# Altium PCB Rackmount_DSP.PcbDoc (part 23 of 24)
Units mil, origin at the board's own origin, x right, y up, seen from the top; angles counter-clockwise.
Board outline 10629.92 x 8267.72 mil, 4 copper layers (Top Layer, Mid Layer 1, Mid Layer 2, Bottom Layer), stack 36.2 mil thick; 4500 components, 1565 nets, 9765 pads, 3289 vias.
Unrouted connection lines stored in the file: 1.
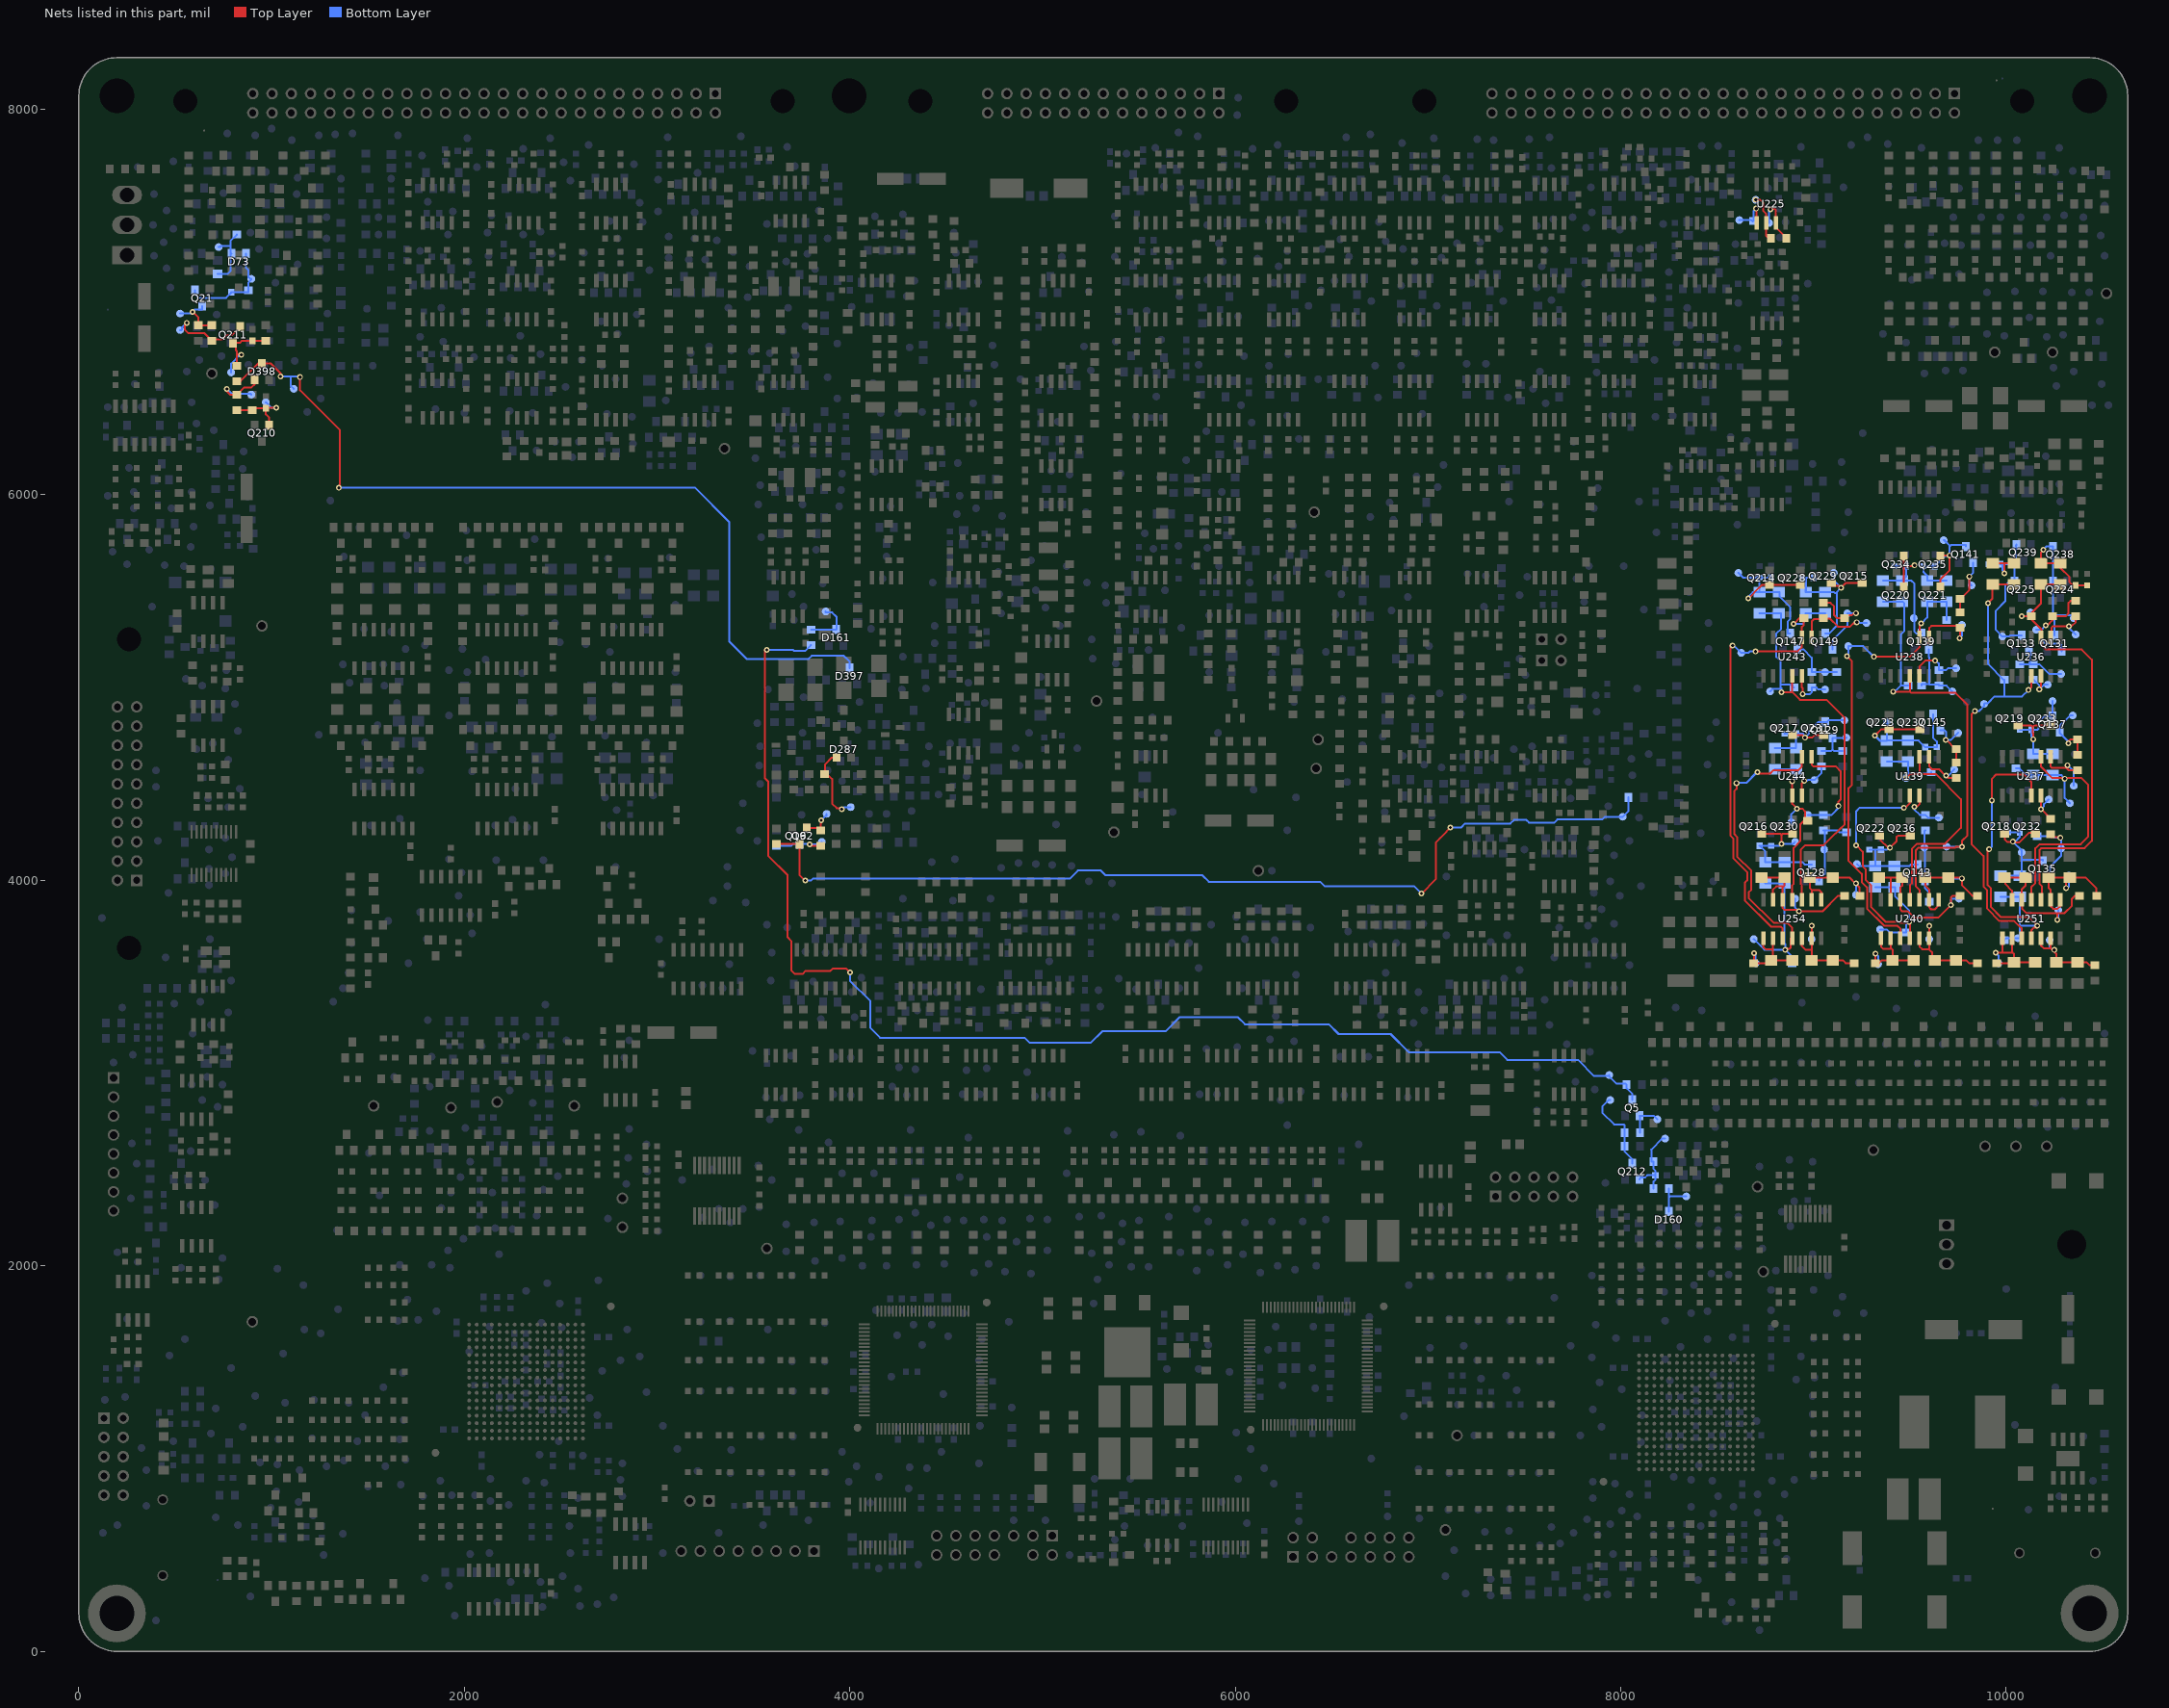
[diagram p25: the nets of this part, all layers, seen from the top]

## Via types
v1: diameter 30, hole 16, Top Layer to Bottom Layer, 3143 vias
v2: diameter 22, hole 12, Top Layer to Bottom Layer, 146 vias

## Nets (pads, with @x,y where several pads share a name; then routed paths per layer and width w, separated by ;. In a path a pad name is that pad's centre, name@x,y a point inside that pad or via, vN(x,y) a via of type N, cw(c..) or ccw(c..) an arc to the next point about the centre after c; other vN are vias at no path point) (continued)
XSIG330007: D287.1 R1093.1 TP1495.1 | length 419.8
  Top Layer w10: R1093.1@3870,4550 R1093.1@3872.5,4550 ; D287.1@3932.5,4638.5 3932.5,4635.9 3906.16,4635.9 3872.5,4602.24 R1093.1@3872.5,4550 ; v1(3957.88,4368.24) 3951.42,4368.24 3948.21,4371.45 3948.21,4374.3 3932.09,4374.3 3907.96,4398.43 3907.96,4525.05 3883.01,4550 R1093.1@3872.5,4550
  Bottom Layer w10: v1(3957.88,4368.24) 3958.12,4368.24 3969.88,4380 TP1495.1@4005,4380
XSIG330012: R1136.2 R1882.2 R1924.2 TP1779.1 U251.5 U251.6 | length 865.9
  Top Layer w10: R1924.2@9990,4015 R1924.2@9994,4015 ; U251.6@10030,3900 10030,3945.92 9994,3981.92 R1924.2@9994,4015 ; v1(10264.77,3795.5) 10264.77,3825.5 10261.54,3828.73 10261.54,3830.25 ; R1136.2@10380,3920 10356.47,3920 10340.66,3904.19 10340.66,3868.65 10302.26,3830.25 10261.54,3830.25 ; R1924.2@9994,4015 R1882.2@10100,4015 10100,3972.5 10080,3952.5 U251.5@10080,3900 10082.17,3900 10082.17,3852.03 10103.95,3830.25 10261.54,3830.25
  Bottom Layer w10: v1(10264.77,3795.5) 10270,3800.73 TP1779.1@10270,3845
XSIG330022: R1420.1 R2689.1 R2690.1 TP1778.1 U237.3 U251.4 | length 1594.2
  Top Layer w10: U251.4@10130,3900 10130,3964.53 10151.17,3985.71 10151.17,4165.65 10173.09,4187.57 10386.28,4187.57 10423.96,4225.25 10423.96,4496.42 10390,4530.38 v1@10301.37,4530.38 ; U237.3@10180,4640 10180,4590 10239.62,4530.38 v1@10301.37,4530.38 ; v1(10303.51,4526.91) 10301.37,4529.05 v1@10301.37,4530.38
  Bottom Layer w10: R1420.1@10050,4580 10068.57,4580 10103.57,4545 R2689.1@10140,4545 R2690.1@10240,4545 10286.5,4545 10303.51,4527.99 v1(10303.51,4526.91) 10303.51,4426.49 TP1778.1@10330,4400
XSIG330038: Q131.1 R2114.1 R2210.2 TP1498.1 | length 513.1
  Top Layer w10: v1(10204.25,5322.96) 10214.11,5322.96 10239.46,5348.3 10239.46,5370 R2210.2@10240,5370 10308.68,5370 10322.31,5383.63 10322.31,5438.83 10333.48,5450 R2114.1@10360,5450
  Bottom Layer w10: TP1498.1@10155,5300 10181.57,5300 10181.57,5297.86 ; v1(10204.25,5322.96) 10204.25,5320.55 10181.57,5297.86 ; Q131.1@10287.5,5188.5 10287.5,5218.35 10278.85,5227 10205.07,5227 10181.57,5250.5 10181.57,5297.86
XSIG330047: R2201.2 R2313.2 R2314.2 TP1502.1 U251.1 U251.2 | length 689.8
  Top Layer w10: U251.1@10280,3900 10280,3865.88 10266.15,3852.03 10243.22,3852.03 10230,3865.25 U251.2@10230,3900 10230,3950 10220,3960 R2314.2@10220,4015 R2313.2@10310.68,4015 ; v1(10310.68,3960.05) R2313.2@10310.68,4015 ; R2201.2@10470,3920 10467.9,3920 10467.9,3957.49 10410.39,4015 R2313.2@10330,4015 R2313.2@10310.68,4015
  Bottom Layer w10: v1(10310.68,3960.05) 10316.55,3960.05 10325,3968.5 TP1502.1@10325,4025
XSIG330060: R2276.1 R2697.1 R2698.1 TP1790.1 U236.3 U251.3 | length 2355.5
  Top Layer w10: v1(10079.41,5369.97) R2276.1@10130,5370 ; U251.3@10180,3900 10184.7,3900 10184.7,3970.09 10173.5,3981.29 10173.5,4158.71 10182.36,4167.57 10406.97,4167.57 10444.43,4205.03 10444.43,5144.36 10391.52,5197.26 10206.72,5197.26 10180,5223.98 U236.3@10180,5260 10182.58,5260 10182.58,5302.21 10130,5354.79 R2276.1@10130,5370 10130,5386.29 10180,5436.29 R2697.1@10180,5535 R2698.1@10280,5535
  Bottom Layer w10: v1(10079.41,5369.97) 10104.97,5369.97 TP1790.1@10125,5390
XSIG330062: R2114.2 TP1504.1 U236.2 | length 280
  Top Layer w10: U236.2@10230,5260 10233.72,5260 10233.72,5310 10241.77,5318.05 v1(10324.88,5318.05) 10338.01,5318.05 10360,5340.04 R2114.2@10360,5370
  Bottom Layer w10: v1(10324.88,5318.05) 10324.88,5310.12 TP1504.1@10360,5275
XSIG330065: Q133.1 R2115.1 R2211.2 TP113.1 | length 306.1
  Bottom Layer w10: R2211.2@10070,5120 R2115.1@10121.95,5120 ; Q133.1@10117.5,5188.5 10121.95,5184.05 R2115.1@10121.95,5120 ; TP113.1@10285,5070 10223.47,5070 10173.47,5120 R2115.1@10140,5120 R2115.1@10121.95,5120
XSIG330079: R2277.1 R2701.1 R2702.1 TP111.1 U236.11 U251.10 | length 2493.9
  Top Layer w10: v1(9837.08,4877.63) 9835.13,4877.63 9820.35,4862.85 9820.35,4401.73 9819.93,4401.31 9819.93,4188.09 9882.02,4126 9882.02,3967.47 9900.5,3948.99 9900.5,3853.22 9964.59,3789.13 10040.87,3789.13 10080,3750 U251.10@10080,3700 ; v1(9905.55,5437.82) 9905.55,5440.16 9928.23,5462.84 9928.23,5522.22 9920.72,5529.72 9926,5535 R2702.1@9930,5535 R2701.1@10040,5535 ; v1(10115.71,4987.11) 10130,5001.4 U236.11@10130,5060
  Bottom Layer w10: v1(9837.08,4877.63) 9858.68,4877.63 9865.75,4884.7 ; 9865.75,4884.75 9885,4904 TP111.1@9885,4915 9888.35,4918.35 9903.35,4918.35 9939.02,4954.02 9990,4954.02 ; v1(9905.55,5437.82) 9905.55,5121.95 9987.5,5040 R2277.1@9990,5040 9990,4954.02 ; v1(10115.71,4987.11) 10082.43,4953.83 9990,4953.83 9990,4954.02
XSIG330080: R2115.2 TP1507.1 U236.12 | length 189.8
  Top Layer w10: v1(10171.28,4990.51) 10180,4999.23 U236.12@10180,5060
  Bottom Layer w10: R2115.2@10140,5040 10142.5,5040 10173.11,5009.39 v1@10173.11,4992.34 ; v1(10171.28,4990.51) v1@10173.11,4992.34 ; TP1507.1@10215,5015 10195.77,5015 v1@10173.11,4992.34
XSIG330084: Q135.1 R2116.1 R2212.2 TP1777.1 | length 419.8
  Top Layer w10: R2116.1@10230,4240 10230,4225 10267.5,4225 10271.9,4220.6 v1(10280.71,4220.6)
  Bottom Layer w10: R2212.2@10160,4230 10241.31,4230 10250.71,4220.6 v1(10280.71,4220.6) 10285,4216.31 TP1777.1@10285,4165 10285,4126.84 10227.5,4069.34 Q135.1@10227.5,4018.5
XSIG330095: R2202.2 R2315.2 R2316.2 TP1508.1 U251.12 U251.13 | length 513.8
  Top Layer w10: U251.12@10180,3700 10180,3661.86 10194.44,3647.42 10230,3647.42 10230,3647.5 ; U251.13@10230,3700 10230,3647.5 ; v1(10249.07,3638.49) v1@10249.07,3628.43 ; R2202.2@10460,3560 10431.5,3560 10416.5,3575 R2316.2@10370,3575 R2315.2@10260,3575 10260,3617.5 v1@10249.07,3628.43 ; 10230,3647.5 v1@10249.07,3628.43
  Bottom Layer w10: TP1508.1@10225,3690 10225.58,3690 10225.58,3655 10242.09,3638.49 v1(10249.07,3638.49)
XSIG330108: R2278.1 R2691.1 R2692.1 TP1509.1 U237.11 U251.11 | length 1841.3
  Top Layer w10: v1(9911.42,4161.26) 9903.21,4153.05 9903.21,3975.14 9921.05,3957.3 9921.05,3860.96 9972.87,3809.13 10116.99,3809.13 v1(10161,3765.12) 10161,3755.36 10144.3,3755.36 10130,3741.06 U251.11@10130,3700 ; v1(9925.81,4414.69) 9925.81,4526.93 9947.84,4548.97 10091.82,4548.97 10130,4510.79 U237.11@10130,4440
  Bottom Layer w10: v1(9911.42,4161.26) 9925.81,4175.64 v1(9925.81,4414.69) ; R2691.1@9970,3915 R2692.1@10070,3915 10070,3765.12 10071.15,3765.12 ; R2278.1@9990,3690 10000,3700 TP1509.1@10060,3700 10071.15,3700 10071.15,3765.12 ; v1(10161,3765.12) 10071.15,3765.12
XSIG330110: R2116.2 TP1510.1 U237.12 | length 207.6
  Top Layer w10: U237.12@10180,4440 10180,4390 10180.54,4389.46 v1(10180.54,4369.46) R2116.2@10230,4320
  Bottom Layer w10: v1(10180.54,4369.46) 10195.25,4384.17 10195.25,4395.25 TP1510.1@10220,4420
XSIG330114: Q137.1 R2117.1 R2213.2 TP146.1 | length 338
  Top Layer w10: v1(10321.66,4711.49) 10321.66,4719.16 10332.5,4730 R2213.2@10370,4730 R2117.1@10370,4650
  Bottom Layer w10: v1(10321.66,4711.49) 10321.66,4720.84 10277.5,4765 Q137.1@10277.5,4768.5 10277.5,4800.74 10331.76,4855 TP146.1@10345,4855
XSIG330126: R2117.2 TP1513.1 U237.2 | length 339.4
  Top Layer w10: U237.2@10230,4640 10230,4590 10235.82,4584.18 10309.66,4584.18 10317.78,4576.06 ; v1(10317.78,4596.9) 10317.78,4576.06 ; R2117.2@10370,4570 10323.84,4570 10317.78,4576.06
  Bottom Layer w10: v1(10317.78,4596.9) 10350,4564.68 TP1513.1@10350,4490
XSIG330128: R2204.2 R2319.2 R2320.2 TP1514.1 U251.8 U251.9 | length 557.1
  Top Layer w10: v1(9945.45,3624.01) 9980,3624.01 ; R2204.2@9950,3570 10029.01,3570 10029.01,3575 R2319.2@10040,3575 ; U251.8@9980,3700 9980,3624.01 ; U251.9@10030,3700 10030,3627.5 10031.67,3625.83 ; R2320.2@10150,3575 R2319.2@10040,3575 ; 9980,3624.01 10029.86,3624.01 10031.67,3625.83 ; 10031.67,3625.83 10040,3617.5 R2319.2@10040,3575
  Bottom Layer w10: v1(9945.45,3624.01) 9960,3609.46 TP1514.1@9960,3570
XSIG330132: Q162.1 R2503.1 TP1515.1 | length 172.9
  Top Layer w10: Q162.1@3777.5,4271.5 R2503.1@3850,4271.5 ; R2503.1@3850,4260 R2503.1@3850,4271.5 ; v1(3850.72,4310.77) 3850.72,4295.72 3850,4295 R2503.1@3850,4271.5
  Bottom Layer w10: v1(3850.72,4310.77) 3874.95,4335 3880,4335 TP1515.1@3880,4345
XSIG330134: Q162.3 R2507.2 R2511.1 TP144.1 | length 5039
  Top Layer w10: R2507.2@3620,4190 3740,4190 Q162.3@3740,4188.5 3740,4026.38 3768.74,3997.65 v1(3768.74,3998.9) ; v1(6966.08,3931.12) 7040.53,4005.57 7040.53,4196.12 7061.41,4217.01 7061.41,4217.91 7094.44,4250.94 7094.44,4252.19 v1(7115.65,4273.4)
  Bottom Layer w10: v1(3768.74,3998.9) 3798.74,3998.9 3808.6,4008.77 5141.53,4008.77 5183.38,4050.62 5302.39,4050.62 5326.28,4026.73 5827.85,4026.73 5862.41,3992.17 6440.71,3992.17 6463.08,3969.8 6927.4,3969.8 v1(6966.08,3931.12) ; v1(7115.65,4273.4) 7170.65,4273.4 7191.62,4294.37 7426.92,4294.37 7445.5,4312.94 7510.35,4312.94 7523.29,4300 7655.24,4300 7670.49,4315.25 7902.77,4315.25 7917.51,4330 TP144.1@8010,4330 8040,4360 R2511.1@8040,4430
XSIG330156: Q9.3 R1299.2 R2503.2 TP1516.1 | length 305.3
  Top Layer w10: v1(3792.1,4186.99) 3799.08,4180 R2503.2@3850,4180
  Bottom Layer w10: R1299.2@3620,4180 3696.5,4180 3705,4188.5 Q9.3@3740,4188.5 3790.58,4188.5 v1(3792.1,4186.99) 3841.99,4186.99 TP1516.1@3855,4200
XSIG330186: C1170.2 Q131.3 Q224.1 Q238.1 R2665.1 R2697.2 R2698.2 TP1501.1 | length 1035.5
  Top Layer w10: v1(10192.5,5714.76) 10180,5702.26 R2697.2@10180,5645 R2698.2@10280,5645 10280,5620.91 10327.75,5573.16 10327.75,5546.66 10344.41,5530 C1170.2@10360,5530 R2665.1@10420,5530
  Bottom Layer w10: v1(10192.5,5714.76) 10192.5,5716.5 10207.5,5731.5 Q238.1@10242.5,5731.5 Q224.1@10242.5,5551.5 10242.5,5374.7 ; Q131.3@10250,5271.5 10250,5363.42 10242.5,5370.92 10242.5,5374.7 ; TP1501.1@10350,5360 10350,5374.7 10242.5,5374.7
XSIG330208: C1171.2 Q133.3 Q225.1 Q239.1 R2666.1 R2701.2 R2702.2 TP1506.1 | length 1001.7
  Top Layer w10: R2702.2@9930,5645 9990.67,5645 ; v1(9990.67,5592.29) 9990.67,5645 ; R2701.2@10040,5645 9990.67,5645
  Bottom Layer w10: R2666.1@9910,5640 C1171.2@9970,5640 C1171.2@9981,5640 ; v1(9990.67,5592.29) 9990.67,5597.83 9981,5607.5 C1171.2@9981,5640 ; Q239.1@10052.5,5741.5 10052.5,5738 10051.15,5736.65 10051.15,5645.52 10045.63,5640 10042.5,5640 ; Q133.3@10080,5271.5 10021.5,5271.5 10015,5265 TP1506.1@9980,5265 9945.46,5299.54 9945.46,5398.4 9995.2,5448.14 9995.2,5529.97 10016.73,5551.5 Q225.1@10042.5,5551.5 10042.5,5640 ; C1171.2@9981,5640 10042.5,5640
XSIG330221: C1172.2 Q135.3 Q218.1 Q232.1 R2659.1 R2691.2 R2692.2 TP1829.1 | length 776.3
  Top Layer w10: Q218.1@9991.5,4242.5 9991.5,4212.31 10005.97,4197.85 v1@10034.18,4197.85 ; v1(10034.18,4200.35) v1@10034.18,4197.85 ; Q232.1@10151.5,4242.5 10151.5,4247.19 10118.59,4247.19 10068.13,4196.73 10034.18,4196.73 v1@10034.18,4197.85
  Bottom Layer w10: R2691.2@9970,4025 R2692.2@10070,4025 10070,4037.14 10080,4037.14 10080,4106.55 ; R2659.1@10010,4250 C1172.2@10070,4250 10070,4224.19 10046.16,4200.35 v1(10034.18,4200.35) 10080,4154.53 TP1829.1@10080,4145 10080,4106.55 ; Q135.3@10190,4101.5 10190,4106.55 10080,4106.55
XSIG330237: C1173.2 Q137.3 Q219.1 Q233.1 R2660.1 R2689.2 R2690.2 TP145.1 | length 767.3
  Top Layer w10: Q219.1@10061.5,4802.5 10130.4,4802.5 10137.48,4795.43 ; v1(10140,4731.81) 10140,4761.81 10137.48,4764.33 10137.48,4795.43 ; Q233.1@10231.5,4802.5 10144.55,4802.5 10137.48,4795.43
  Bottom Layer w10: R2660.1@10070,4780 C1173.2@10130,4780 ; R2690.2@10240,4655 R2689.2@10140,4655 v1(10140,4731.81) 10140,4737.5 10130,4747.5 C1173.2@10130,4780 ; TP145.1@10240,4930 Q137.3@10240,4851.5 10199.22,4851.5 10167.5,4819.78 10167.5,4787.07 10161,4780.57 10130,4780.57 C1173.2@10130,4780
XSIG340015: R1118.2 R1864.2 R1919.2 TP1517.1 U240.12 U240.13 | length 587.6
  Top Layer w10: U240.12@9550,3700 9550,3656.15 9563.71,3642.43 9600,3642.43 ; v1(9600,3763.53) U240.13@9600,3700 9600,3642.43 ; R1118.2@9850,3570 9807,3570 9792,3585 R1864.2@9740,3585 R1919.2@9630,3585 9626,3585 9616.53,3594.47 9616.53,3624.71 9600,3641.23 9600,3642.43
  Bottom Layer w10: TP1517.1@9600,3695 v1(9600,3763.53)
XSIG340025: R1412.1 R2707.1 R2708.1 TP1518.1 U139.11 U240.11 | length 1702.8
  Top Layer w10: v1(9221.71,4181.67) 9255.11,4148.27 9255.11,4072.49 9270.14,4057.47 9270.14,4002.19 9297.5,3974.82 9297.5,3862.14 9375.23,3784.42 9443.87,3784.42 9448.87,3779.42 9490.61,3779.42 v1(9496.64,3785.45) 9500,3782.09 U240.11@9500,3700 ; v1(9469.01,4376.61) 9476.02,4376.61 9500,4400.59 U139.11@9500,4440
  Bottom Layer w10: v1(9221.71,4181.67) 9221.71,4358.95 9239.38,4376.61 v1(9469.01,4376.61) ; R2707.1@9320,3965 R2708.1@9420,3965 9423.53,3965 9423.53,3915.68 9496.64,3842.57 v1(9496.64,3785.45) 9480,3768.81 R1412.1@9480,3730 9395,3730 9380,3745 TP1518.1@9345,3745
XSIG340028: R1119.2 R1865.2 R1920.2 TP1519.1 U240.5 U240.6 | length 873.8
  Top Layer w10: R1920.2@9340,4015 9400,4015 ; U240.6@9400,3900 9400,4015 ; R1119.2@9760,3920 9720.94,3920 9711.97,3911.03 v1(9711.97,3871.1) 9648.59,3807.72 9520.99,3807.72 9489.3,3839.42 9460.58,3839.42 9450,3850 U240.5@9450,3900 9450,3962.5 9460,3972.5 R1865.2@9460,4015 9400,4015
  Bottom Layer w10: v1(9711.97,3871.1) 9711.97,3896.97 9720,3905 TP1519.1@9755,3905
XSIG340037: R1413.1 R2705.1 R2706.1 TP1520.1 U139.3 U240.4 | length 1500.7
  Top Layer w10: v1(9480,4530) 9501.27,4551.27 9550,4551.27 ; U240.4@9500,3900 9500,3974.79 9511.25,3986.04 9511.25,4164.75 9536,4189.5 9682.75,4189.5 9765,4271.75 9765,4421 9636.07,4549.93 9550,4549.93 9550,4551.27 ; U139.3@9550,4640 9550,4551.27
  Bottom Layer w10: R2706.1@9380,4615 R2705.1@9490,4615 9490,4554.75 ; R1413.1@9610,4560 9610,4554.75 9490,4554.75 ; TP1520.1@9486.53,4536.53 9490,4540 9490,4554.75 ; TP1520.1@9486.53,4536.53 9493.06,4530 v1(9480,4530) TP1520.1@9486.53,4536.53
XSIG340050: Q139.1 R2118.1 R2214.2 TP143.1 | length 373.2
  Bottom Layer w10: R2214.2@9560,5010 9560,5017.8 9600.57,5017.8 9600.78,5017.58 ; Q139.1@9597.5,5198.5 9597.5,5160 9600.78,5156.72 9600.78,5017.58 ; TP143.1@9720,4980 9690,5010 R2118.1@9650,5010 9650,5015.43 9602.93,5015.43 ; 9600.78,5017.58 9600.78,5015.43 9602.93,5015.43 ; 9600.78,5017.58 9602.93,5015.43
XSIG340061: R2203.2 R2317.2 R2318.2 TP1524.1 U240.1 U240.2 | length 661.1
  Top Layer w10: U240.1@9650,3900 9650,3869.68 9629.8,3849.48 9610.59,3849.48 9600,3860.07 U240.2@9600,3900 9600,3952.5 9580,3972.5 R2318.2@9580,4015 R2317.2@9700,4015 9758.37,4015 9763.37,4010 v1(9769.61,4010) 9769.61,3974.45 9824.06,3920 R2203.2@9850,3920
  Bottom Layer w10: TP1524.1@9695,4010 v1(9769.61,4010)
XSIG340075: R2118.2 TP1526.1 U238.12 | length 297.5
  Top Layer w10: U238.12@9550,5060 9550,5110 9579.64,5139.64 v1(9630.78,5139.64)
  Bottom Layer w10: v1(9630.78,5139.64) 9635.36,5139.64 9650,5125 R2118.2@9650,5090 9687.5,5090 9697.5,5100 TP1526.1@9740,5100
XSIG340081: Q141.1 R2119.1 R2215.2 TP1776.1 | length 338.4
  Top Layer w10: R2119.1@9760,5390 R2215.2@9760,5460 9762.5,5460 9808.94,5506.44 v1(9808.94,5575.86)
  Bottom Layer w10: TP1776.1@9820,5530 9808.94,5541.06 v1(9808.94,5575.86) 9827.5,5594.42 Q141.1@9827.5,5648.5
XSIG340096: R2280.1 R2699.1 R2700.1 TP155.1 U238.3 U240.10 | length 2546.9
  Top Layer w10: v1(9173.43,5162.35) 9198.7,5137.08 9198.7,4494.96 9182.03,4478.29 9182.03,4101.16 9250,4033.19 9250,3990.6 9277.5,3963.1 9277.5,3853.86 9366.94,3764.42 9435.58,3764.42 9450,3750 U240.10@9450,3700 ; v1(9313.25,5159.31) 9314.82,5160.88 9500.88,5160.88 9550,5210 U238.3@9550,5260 9550,5323.28 v1(9558.85,5332.13)
  Bottom Layer w10: v1(9173.43,5162.35) 9180,5168.91 TP155.1@9180,5215 9257.56,5215 v1(9313.25,5159.31) ; v1(9558.85,5332.13) 9590,5363.28 R2700.1@9590,5445 R2699.1@9690,5445 R2280.1@9690,5350
XSIG340098: R2119.2 TP1775.1 U238.2 | length 346.3
  Top Layer w10: U238.2@9600,5260 9599.56,5260 9599.56,5308.98 9610.75,5320.17 9740.77,5320.17 9749.83,5320.17 R2119.2@9760,5310 9760,5258.2 v1(9758.28,5256.49)
  Bottom Layer w10: v1(9758.28,5256.49) 9770,5268.2 TP1775.1@9770,5325
XSIG340101: Q143.1 R2120.1 R2216.2 TP154.1 | length 383.9
  Bottom Layer w10: R2120.1@9580,4260 9575,4255 TP154.1@9575,4170 9577.5,4170 Q143.1@9577.5,3998.5 9577.5,3960 9600,3937.5 R2216.2@9600,3890
XSIG340110: R2120.2 TP1531.1 U139.12 | length 235.3
  Top Layer w10: v1(9522.99,4381.13) 9524.52,4382.67 9537.46,4382.67 9550,4395.21 U139.12@9550,4440
  Bottom Layer w10: v1(9522.99,4381.13) 9522.99,4368.5 9551.49,4340 R2120.2@9580,4340 9595,4325 TP1531.1@9650,4325
XSIG340112: R2205.2 R2321.2 R2322.2 TP1532.1 U240.8 U240.9 | length 539.8
  Top Layer w10: v1(9321.87,3619.31) 9321.87,3606.87 9320,3605 R2205.2@9320,3570 9340.3,3570 9355.3,3585 R2322.2@9410,3585 ; U240.8@9350,3700 9350,3656.16 9361.97,3644.19 9400,3644.19 9400,3650 ; U240.9@9400,3700 9400,3650 ; R2321.2@9520,3585 R2322.2@9410,3585 ; 9400,3650 9410,3640 R2322.2@9410,3585
  Bottom Layer w10: v1(9321.87,3619.31) 9335,3606.18 TP1532.1@9335,3565
XSIG340124: Q145.1 R2121.1 R2217.2 TP1534.1 | length 298.2
  Top Layer w10: v1(9686.5,4729.17) 9688.33,4729.17 9737.5,4680 R2217.2@9740,4680 R2121.1@9740,4610
  Bottom Layer w10: Q145.1@9657.5,4778.5 9680.26,4778.5 9688.11,4770.65 9688.11,4730.77 v1(9686.5,4729.17) 9714.17,4729.17 TP1534.1@9750,4765
XSIG340127: R2121.2 TP1535.1 U139.2 | length 270.2
  Top Layer w10: U139.2@9600,4640 9600,4591.3 9615.28,4576.02 9652.38,4576.02 9685.18,4543.22 v1@9687.05,4543.22 ; v1(9687.45,4543.22) v1@9687.05,4543.22 ; R2121.2@9740,4530 9700.26,4530 v1@9687.05,4543.22
  Bottom Layer w10: v1(9687.45,4543.22) 9698.22,4543.22 TP1535.1@9730,4575
XSIG340148: C1162.2 Q139.3 Q220.1 Q234.1 R2661.1 R2703.2 R2704.2 TP1828.1 | length 871.7
  Top Layer w10: Q220.1@9467.5,5521.5 9467.5,5631.18 ; Q234.1@9467.5,5681.5 9467.5,5631.18 ; v1(9524.25,5634.2) 9524.25,5631.18 9467.5,5631.18
  Bottom Layer w10: R2703.2@9360,5555 R2704.2@9460,5555 ; R2661.1@9420,5630 C1162.2@9480,5630 ; TP1828.1@9520,5360 TP1828.1@9523.96,5360 ; v1(9524.25,5634.2) 9520.05,5630 C1162.2@9480,5630 ; Q139.3@9560,5281.5 9532.39,5281.5 9523.96,5289.93 TP1828.1@9523.96,5360 ; R2704.2@9460,5555 9507.1,5555 9523.96,5538.15 TP1828.1@9523.96,5360 ; R2704.2@9460,5555 9480,5575 C1162.2@9480,5630
XSIG340151: R2279.1 R2703.1 R2704.1 TP1525.1 U238.11 U240.3 | length 2473
  Top Layer w10: v1(9412.98,4978.97) 9499.64,4978.97 9500,4979.34 ; U238.11@9500,5060 9500,4979.34 ; U240.3@9550,3900 9550,3950 9531.25,3968.75 9531.25,4156.47 9544.28,4169.5 9735.34,4169.5 9739.72,4173.88 v1(9769.72,4173.88) 9769.72,4203.88 9798.31,4232.47 9798.31,4910.68 9736.73,4972.27 9507.07,4972.27 9500,4979.34
  Bottom Layer w10: R2703.1@9360,5445 R2704.1@9460,5445 9464,5445 9470.44,5438.56 9470.44,5292.08 9452.5,5274.14 9452.5,5010 ; v1(9412.98,4978.97) 9421.47,4978.97 9452.5,5010 ; R2279.1@9490,5010 9452.5,5010 ; TP1525.1@9690,4175 9769.72,4175 v1(9769.72,4173.88)
XSIG340162: C1163.2 Q141.3 Q221.1 Q235.1 R2662.1 R2699.2 R2700.2 TP1827.1 | length 765.2
  Top Layer w10: Q221.1@9657.5,5521.5 9657.5,5560.06 9706.04,5608.6 v1(9706.04,5685.75) 9661.75,5685.75 Q235.1@9657.5,5681.5
  Bottom Layer w10: TP1827.1@9675,5765 9678.07,5765 9708.69,5734.39 ; R2699.2@9690,5555 R2700.2@9590,5555 9590,5580 9570,5600 R2662.1@9570,5630 C1163.2@9630,5630 9682.13,5682.13 9702.42,5682.13 v1(9706.04,5685.75) 9706.04,5731.75 9708.69,5734.39 ; Q141.3@9790,5731.5 9790,5739.9 9714.19,5739.9 9708.69,5734.39
XSIG340175: C1164.2 Q145.3 Q223.1 Q237.1 R2664.1 R2705.2 R2706.2 TP1826.1 | length 869.7
  Top Layer w10: v1(9318.5,4750.98) 9350.01,4782.5 Q223.1@9391.5,4782.5 Q237.1@9551.5,4782.5
  Bottom Layer w10: v1(9318.5,4750.98) 9345.97,4723.51 9380,4723.51 R2706.2@9380,4725 ; TP1826.1@9380,4820 R2706.2@9380,4725 ; Q145.3@9620,4861.5 9620,4740 9640,4720 R2664.1@9640,4690 C1164.2@9580,4690 9545,4725 R2705.2@9490,4725 R2706.2@9380,4725
XSIG340187: C1165.2 Q143.3 Q222.1 Q236.1 R2663.1 R2707.2 R2708.2 TP1825.1 | length 756.3
  Top Layer w10: Q222.1@9341.5,4232.5 9347.31,4232.5 9347.31,4208.66 9386.5,4169.47 v1(9396.89,4169.47) 9431.52,4204.1 9431.52,4225.43 9438.59,4232.5 Q236.1@9501.5,4232.5
  Bottom Layer w10: TP1825.1@9225,4085 9235,4075 R2707.2@9320,4075 ; R2663.1@9290,4160 9320,4160 ; v1(9396.89,4169.47) 9390.47,4169.47 9381,4160 C1165.2@9350,4160 9320,4160 ; Q143.3@9540,4081.5 9505,4081.5 9498.5,4075 R2708.2@9420,4075 R2707.2@9320,4075 ; R2707.2@9320,4075 9320,4160
XSIG350013: R1124.2 R1870.2 R1909.2 TP1537.1 U254.1 U254.2 | length 597.4
  Top Layer w10: U254.2@8990,3900 8990,3950 ; U254.1@9040,3900 9040,3939.02 9028.68,3950.34 8990,3950.34 8990,3950 ; R1124.2@9240,3920 9238.44,3920 9238.44,3963.61 9220,3982.06 v1(9220,3983.47) 9217.43,3983.47 9185.91,4015 R1870.2@9100,4015 R1909.2@8980,4015 8980,3960 8990,3950
  Bottom Layer w10: TP1537.1@9220,3925 v1(9220,3983.47)
XSIG350025: R1414.1 R2687.1 R2688.1 TP1538.1 U243.11 U254.3 | length 2248.7
  Top Layer w10: v1(8833.87,4975.08) 8833.87,4974.89 8890,4974.89 8890,4976.15 ; U243.11@8890,5060 8890,4976.15 ; U254.3@8940,3900 8940,3974.79 8933.5,3981.29 8933.5,4158.71 8957.31,4182.52 9052.9,4182.52 9115.37,4245 9116.36,4245 9136,4264.64 9136,4265.63 9161.22,4290.84 9161.22,4842.28 9066.99,4936.51 8929.64,4936.51 8890,4976.15
  Bottom Layer w10: R2687.1@8720,5385 R2688.1@8820,5385 8831.54,5385 8831.54,5305.04 8807.5,5281 8807.5,5158.52 8830,5136.02 8830,5016.78 ; TP1538.1@8775,4980 8789.39,4994.39 8833.87,4994.39 ; v1(8833.87,4975.08) 8833.87,4994.39 ; R1414.1@8900,5000 8897.5,5000 8881.85,5015.65 8830,5015.65 8830,5016.78 ; 8830,5016.78 8830,4999.48 8833.87,4995.61 8833.87,4994.39
XSIG350028: R1125.2 R1871.2 R1910.2 TP1539.1 U254.8 U254.9 | length 541.1
  Top Layer w10: R1125.2@8690,3570 R1125.2@8691.14,3570 ; v1(8691.14,3622.72) R1125.2@8691.14,3570 ; U254.8@8740,3700 8740,3653 8752.07,3640.93 8790,3640.93 ; U254.9@8790,3700 8790,3640.93 ; R1910.2@8890,3585 R1871.2@8790,3585 ; R1125.2@8691.14,3570 8780,3570 R1871.2@8780,3585 R1871.2@8790,3585 ; R1871.2@8790,3585 8790,3640.93
  Bottom Layer w10: v1(8691.14,3622.72) 8700,3613.85 TP1539.1@8700,3570
XSIG350038: R1415.1 R2685.1 R2686.1 TP1774.1 U243.3 U254.10 | length 2503.4
  Top Layer w10: v1(8580.24,5218.64) 8570.03,5218.64 8570.03,4230.69 8583.87,4216.86 8583.87,4115.2 8656.38,4042.69 8656.38,3999.46 8643.57,3986.65 8643.57,3895.55 8779.55,3759.57 8830.43,3759.57 8840,3750 U254.10@8840,3700 ; v1(8698.89,5187.01) 8698.89,5188.43 8918.43,5188.43 8940,5210 U243.3@8940,5260 8940,5315 8950,5325 R1415.1@8950,5360 8950,5362.96 8930.46,5362.96 8897.54,5330.04 v1(8895.9,5330.04)
  Bottom Layer w10: v1(8580.24,5218.64) 8586.36,5218.64 TP1774.1@8625,5180 8661.88,5180 8668.89,5187.01 v1(8698.89,5187.01) ; v1(8895.9,5330.04) 8941.99,5330.04 8960,5348.06 R2685.1@8960,5385 R2686.1@9060,5385
XSIG350041: R1126.2 R1872.2 R1911.2 TP1540.1 U254.5 U254.6 | length 832.5
  Top Layer w10: R1911.2@8730,4015 R1872.2@8850,4015 8850,3972.5 8840,3962.5 ; U254.6@8790,3900 8790,3952.21 8806.64,3968.85 8840,3968.85 8840,3962.5 ; R1126.2@9160,3920 9128.35,3920 9047.69,3839.34 v1(8924.77,3839.34) 8916.39,3847.72 8848.67,3847.72 8840,3856.39 U254.5@8840,3900 8840,3962.5
  Bottom Layer w10: TP1540.1@8905,3905 8905,3859.11 v1(8924.77,3839.34)
XSIG350054: R1416.1 R2693.1 R2694.1 TP1773.1 U244.11 U254.4 | length 966.1
  Top Layer w10: U254.4@8890,3900 8890,3974.79 8896.5,3981.29 8896.5,4168.25 8932.5,4204.25 8932.5,4291.37 8956.02,4314.89 R1416.1@8956.02,4321.48 ; v1(8890,4514.46) U244.11@8890,4440 8890,4396.45 v1(8914.42,4372.03) 8941.65,4372.03 8956.02,4357.66 R1416.1@8956.02,4321.48 ; R1416.1@8970,4310 8967.5,4310 R1416.1@8956.02,4321.48
  Bottom Layer w10: R2694.1@8800,4575 R2693.1@8908.04,4575 ; TP1773.1@8885,4300 8885,4342.61 v1(8914.42,4372.03) ; v1(8890,4514.46) 8908.04,4532.5 R2693.1@8908.04,4575 ; R2693.1@8910,4575 R2693.1@8908.04,4575
XSIG350057: R1127.2 R1873.2 R1912.2 TP1541.1 U254.12 U254.13 | length 573.1
  Top Layer w10: U254.12@8940,3700 8940,3658.97 8960.54,3638.43 8990,3638.43 ; v1(8990,3763.69) U254.13@8990,3700 8990,3638.43 ; R1127.2@9210,3570 9167,3570 9152,3585 R1873.2@9100,3585 R1912.2@8990,3585 8990,3638.43
  Bottom Layer w10: TP1541.1@8990,3695 v1(8990,3763.69)
XSIG350067: R1417.1 R2695.1 R2696.1 TP1542.1 U244.3 U254.11 | length 2231.8
  Top Layer w10: v1(8600.38,4504.7) 8600.38,4474.7 8590.03,4464.36 8590.03,4238.98 8603.87,4225.14 8603.87,4123.5 8676.73,4050.64 8676.73,3950.87 8663.7,3937.85 8663.7,3908.58 8792.71,3779.57 8856.96,3779.57 8858.81,3777.72 8866.04,3777.72 8890,3753.75 U254.11@8890,3700 8881.16,3700 8881.16,3650 8876.43,3645.27 8858.27,3645.27 v1(8853.01,3640) ; v1(8708.28,4561.02) 8708.28,4553.6 8774.04,4553.6 8790.44,4570 8920,4570 8940,4590 U244.3@8940,4640
  Bottom Layer w10: v1(8600.38,4504.7) 8600.38,4506 8651.41,4506 8706.43,4561.02 v1(8708.28,4561.02) ; TP1542.1@8690,3695 8745,3640 v1(8853.01,3640) ; R2696.1@8750,3985 R2695.1@8850,3985 8850,3673.01 8853.01,3670 v1(8853.01,3640) ; R1417.1@8890,3570 8890,3605 8888.01,3605 v1(8853.01,3640)
XSIG350080: Q147.1 R2122.1 R2218.2 TP1772.1 | length 295.7
  Bottom Layer w10: Q147.1@8917.5,5198.5 8946.74,5198.5 8990,5155.24 R2122.1@8990,5080 TP1772.1@9060,5080 R2218.2@9120,5080
XSIG350089: R2122.2 TP1546.1 U243.12 | length 243.4
  Top Layer w10: U243.12@8940,5060 8940,5000.87 8944.36,4996.51 v1(8944.36,4966.51)
  Bottom Layer w10: v1(8944.36,4966.51) 8981.14,4966.51 8990,4975.37 R2122.2@8990,5000 9015,5000 9025,4990 TP1546.1@9060,4990
XSIG350091: Q149.1 R2123.1 R2219.2 TP1547.1 | length 514.3
  Top Layer w10: R2123.1@9050,5440 9087.64,5440 9106.37,5421.27 9106.37,5375.24 9121.61,5360 R2219.2@9160,5360 9160,5375 9197.5,5375 9208.78,5386.28 v1(9220.2,5386.28)
  Bottom Layer w10: Q149.1@9097.5,5198.5 9097.5,5243.77 9175,5321.27 TP1547.1@9175,5385 9210,5385 9211.28,5386.28 v1(9220.2,5386.28)
XSIG350103: R2123.2 TP1678.1 U243.2 | length 415.2
  Top Layer w10: U243.2@8990,5260 8990,5342.9 9002.26,5355.16 9050,5355.16 R2123.2@9050,5360 9052.5,5360 9054.58,5357.92 9084.19,5357.92 9126.55,5315.56 9189.44,5315.56 9211.71,5337.83 9223.62,5337.83 v1(9224.47,5338.67)
  Bottom Layer w10: v1(9224.47,5338.67) 9228.55,5338.67 9232.56,5342.68 9236.18,5342.68 9236.18,5336.55 9275,5336.55 TP1678.1@9275,5335
XSIG350105: Q128.1 R2112.1 R2208.2 TP1771.1 | length 401.4
  Bottom Layer w10: Q128.1@9027.5,3998.5 9027.5,4002 9058.11,4032.61 TP1771.1@9058.11,4160 ; R2112.1@9050,4260 R2112.1@9058.11,4260 ; TP1771.1@9055,4160 TP1771.1@9058.11,4160 ; R2208.2@9170,4250 9132.5,4250 9122.5,4260 R2112.1@9058.11,4260 ; TP1771.1@9058.11,4160 R2112.1@9058.11,4260
XSIG350117: R2112.2 TP1770.1 U244.2 | length 579.8
  Top Layer w10: U244.2@8990,4640 8990,4600.57 9000.57,4590 9117,4590 9141.09,4565.91 9141.09,4419.32 9129.67,4407.9 v1(9129.67,4385.46)
  Bottom Layer w10: TP1770.1@8970,4340 R2112.2@9050,4340 9094.47,4340 9133.4,4378.93 9129.67,4378.93 v1(9129.67,4385.46)
XSIG350119: Q129.1 R2113.1 R2209.2 TP1554.1 | length 251.3
  Bottom Layer w10: R2113.1@9040,4670 9090.43,4670 9097.5,4677.07 ; R2209.2@9150,4670 9107.19,4670 9100.12,4677.07 9097.5,4677.07 ; TP1554.1@9170,4740 9170,4738.5 Q129.1@9097.5,4738.5 9097.5,4677.07
XSIG350131: R2113.2 TP1557.1 U244.12 | length 219.6
  Top Layer w10: U244.12@8940,4440 8940,4503.08 v1(8952.47,4515.55)
  Bottom Layer w10: v1(8952.47,4515.55) 8965.55,4515.55 8970,4520 TP1557.1@9005,4520 9040,4555 R2113.2@9040,4590
XSIG350146: C1166.2 Q147.3 Q214.1 Q228.1 R2655.1 R2687.2 R2688.2 TP1824.1 | length 990.9
  Top Layer w10: v1(8662.14,5462.32) 8718.31,5518.49 8718.99,5518.49 8733,5532.5 Q214.1@8771.5,5532.5 Q228.1@8931.5,5532.5
  Bottom Layer w10: TP1824.1@8610,5595 8635,5570 R2655.1@8720,5570 ; v1(8662.14,5462.32) 8662.14,5472.02 8685.12,5495 R2687.2@8720,5495 ; C1166.2@8780,5570 R2655.1@8720,5570 ; Q147.3@8880,5281.5 8865.9,5281.5 8865.9,5342.47 8880,5356.57 8880,5416.13 8823.07,5473.07 8823.07,5495 R2688.2@8820,5495 R2687.2@8720,5495 ; R2687.2@8720,5495 R2655.1@8720,5570
XSIG350157: C1167.2 Q149.3 Q215.1 Q229.1 R2656.1 R2685.2 R2686.2 TP1823.1 | length 866.4
  Top Layer w10: Q229.1@9091.5,5542.5 9091.5,5527.5 9133.09,5527.5 v1(9142.46,5518.13) 9166.83,5542.5 Q215.1@9251.5,5542.5
  Bottom Layer w10: R2656.1@8940,5570 8960,5570 ; C1167.2@9000,5570 8960,5570 ; Q149.3@9060,5281.5 9082.21,5281.5 9121.24,5320.52 9121.24,5489.88 9114.21,5489.88 ; TP1823.1@9105,5595 9105,5555.59 v1(9142.46,5518.13) 9114.21,5489.88 ; 8960,5570 R2685.2@8960,5495 R2686.2@9060,5495 9106.5,5495 9111.62,5489.88 9114.21,5489.88
XSIG350171: C1168.2 Q128.3 Q216.1 Q230.1 R2657.1 R2695.2 R2696.2 TP1822.1 | length 748.7
  Top Layer w10: Q216.1@8731.5,4242.5 8826.93,4242.5 8834.01,4235.43 ; v1(8834.01,4188.9) 8834.01,4235.43 ; Q230.1@8891.5,4242.5 8841.08,4242.5 8834.01,4235.43
  Bottom Layer w10: TP1822.1@8905,4200 8893.9,4188.9 v1(8834.01,4188.9) 8825.1,4180 R2657.1@8780,4180 C1168.2@8720,4180 8750,4150 R2696.2@8750,4095 R2695.2@8850,4095 8941.5,4095 8955,4081.5 Q128.3@8990,4081.5
XSIG350183: C1169.2 Q129.3 Q217.1 Q231.1 R2658.1 R2693.2 R2694.2 TP1555.1 | length 723.8
  Top Layer w10: Q217.1@8891.5,4752.5 8942.95,4752.5 v1(8955.45,4740) 8992.98,4740 9005.48,4752.5 Q231.1@9051.5,4752.5
  Bottom Layer w10: R2694.2@8800,4685 R2693.2@8910,4685 C1169.2@8910,4760 ; R2658.1@8850,4760 C1169.2@8910,4760 ; TP1555.1@9160,4830 9078.43,4830 9069.93,4821.5 Q129.3@9060,4821.5 9025,4821.5 8976.67,4773.17 8976.67,4761.21 v1(8955.45,4740) 8955.45,4750 8945.45,4760 C1169.2@8910,4760
XSIG360136: C1.1 D73.1 R965.2 TP1344.1 | length 351.8
  Bottom Layer w10: C1.1@720,7145 770.73,7145 787.8,7162.07 787.8,7246.8 D73.1@792.5,7251.5 786.89,7251.5 786.89,7291.78 ; TP1344.1@725,7285 735,7285 735,7290 736.78,7291.78 786.89,7291.78 ; R965.2@820,7350 819.81,7350 786.89,7317.09 786.89,7291.78
XSIG360138: Q211.1 R2649.1 TP1821.1 | length 443.8
  Top Layer w10: v1(559.36,6892.09) 550.71,6892.09 550.71,6855.65 568.62,6837.74 652.26,6837.74 R2649.1@690,6800 690,6805.24 746.83,6805.24 771.23,6829.65 795.65,6829.65 Q211.1@837.5,6871.5
  Bottom Layer w10: TP1821.1@525,6855 533.38,6855 534.65,6856.27 534.65,6867.39 v1(559.36,6892.09)
XSIG360139: C430.2 D73.2 Q21.1 R660.2 TP162.1 | length 543.5
  Bottom Layer w10: Q21.1@602.5,7061.5 602.5,7040.4 621,7021.89 763.39,7021.89 790,7048.5 C430.2@790,7050 880,7050 R660.2@880,7060 880,7101.45 895,7116.45 TP162.1@895,7120 892.19,7117.19 880,7129.38 880,7165.25 867.5,7177.75 D73.2@867.5,7251.5
XSIG360140: D397.3 D398.3 R2647.2 TP1820.1 | length 4574.6
  Top Layer w10: R2647.2@820,6590 839.18,6590 930.68,6681.5 D398.3@950,6681.5 995.77,6681.5 1045.74,6631.54 v1(1045.74,6613.44) ; v1(1147.52,6610.66) 1147.52,6542.51 1352.85,6337.18 1352.85,6035.89 v1(1349.03,6035.89)
  Bottom Layer w10: v1(1045.74,6613.44) 1098.78,6613.44 ; TP1820.1@1115,6550 1098.78,6566.22 1098.78,6613.44 ; v1(1147.52,6610.66) 1147.52,6613.44 1098.78,6613.44 ; v1(1349.03,6035.89) 3197.81,6035.89 3374.55,5859.15 3374.55,5238.97 3464.31,5149.21 3785.74,5149.21 3801.82,5165.3 3968.88,5165.3 4000,5134.18 D397.3@4000,5101.5
XSIG360142: C1157.1 Q211.3 R2647.1 R2652.2 TP1819.1 | length 455.5
  Top Layer w10: Q211.3@800,6788.5 Q211.3@815.43,6788.5 ; R2647.1@820,6670 819.28,6670 819.28,6745.43 820,6745.43 ; v1(842.77,6726.57) 842.77,6729.63 820,6729.63 820,6745.43 ; R2652.2@970,6800 C1157.1@900,6800 846.5,6800 835,6788.5 Q211.3@815.43,6788.5 ; Q211.3@815.43,6788.5 815.43,6750 820,6745.43
  Bottom Layer w10: TP1819.1@790,6635 790,6680.29 836.28,6726.57 v1(842.77,6726.57)
XSIG360149: Q21.3 R2649.2 R2650.1 TP1818.1 | length 293.3
  Top Layer w10: v1(590,6949.08) 620,6919.08 R2650.1@620,6880 R2649.2@690,6880
  Bottom Layer w10: TP1818.1@525,6940 580.92,6940 v1(590,6949.08) 600.92,6960 640,6960 Q21.3@640,6978.5
XSIG360151: C1158.2 Q210.1 R2648.1 R2651.1 TP1817.1 | length 377.3
  Top Layer w10: R2648.1@820,6440 R2651.1@900,6440 900,6450 C1158.2@970,6450 ; Q210.1@987.5,6361.5 987.5,6400 970,6417.5 C1158.2@970,6450 ; v1(1024.55,6452.2) 972.2,6452.2 C1158.2@970,6450
  Bottom Layer w10: TP1817.1@970,6480 997.8,6452.2 v1(1024.55,6452.2)
XSIG360156: D398.1 R2648.2 TP1816.1 | length 352.4
  Top Layer w10: v1(768.21,6549.02) 768.21,6543.45 764.6,6539.84 784.45,6520 R2648.2@820,6520 820.19,6520 857.39,6557.2 895.65,6557.2 912.5,6574.05 D398.1@912.5,6598.5
  Bottom Layer w10: v1(768.21,6549.02) 793.11,6524.11 890.76,6524.11 894.87,6520 TP1816.1@895,6520
XSIG360166: R1724.2 TP1815.1 U225.5 | length 223.8
  Top Layer w10: v1(8702.62,7484.86) 8705,7482.48 U225.5@8705,7410
  Bottom Layer w10: TP1815.1@8615,7425 8677.1,7425 8683.08,7419.02 8684.06,7420 R1724.2@8690,7420 8690,7472.24 v1(8702.62,7484.86)
XSIG360167: R1723.1 TP1814.1 U225.6 | length 257.4
  Top Layer w10: v1(8700,7530) 8724.7,7530 8738.48,7516.22 8738.48,7474.43 8755,7457.91 U225.6@8755,7410 8752.84,7410 8752.84,7345.62 8768.45,7330 R1723.1@8780,7330
XSIG360168: R1723.2 TP1813.1 U225.7 | length 286.5
  Top Layer w10: v1(8776.05,7480.06) 8776.05,7483.54 8799.18,7483.54 8805,7477.72 U225.7@8805,7410 8805,7386.5 8860,7331.5 R1723.2@8860,7330
  Bottom Layer w10: TP1813.1@8770,7410 8770,7480.06 8770,7482.57 8776.05,7482.57 v1(8776.05,7480.06)
XSIG360174: Q5.1 R73.1 TP1812.1 | length 189.7
  Bottom Layer w10: R73.1@8100,2690 8100,2776 Q5.1@8097.5,2778.5 8171.5,2778.5 TP1812.1@8190,2760
XSIG360175: C1159.2 Q212.1 R70.1 R71.2 TP1811.1 | length 413.1
  Bottom Layer w10: Q212.1@8097.5,2448.5 8097.5,2452 8104.7,2459.2 8126.92,2459.2 8137.72,2470 C1159.2@8180,2470 ; R70.1@8170,2400 8170,2437.5 8180,2447.5 C1159.2@8180,2470 ; TP1811.1@8230,2660 8228.4,2660 8227.29,2661.11 8216.08,2661.11 8157.91,2602.94 8158.51,2602.35 8158.51,2540 R71.2@8170,2540 8170,2502.5 8180,2492.5 C1159.2@8180,2470
XSIG360176: Q5.3 R74.2 R75.1 TP1810.1 | length 6893
  Top Layer w10: v1(3568.76,5196.14) 3564.74,5196.14 3558.93,5196.14 3558.93,4531.04 3576.42,4513.55 3576.42,4128.81 3676.5,4028.74 3676.5,3704.69 3696.44,3684.74 3696.44,3532.82 3714.87,3514.39 3755.21,3514.39 3770.74,3529.92 3898.77,3529.92 3910.65,3541.8 3981.8,3541.8 v1(4000.8,3522.8)
  Bottom Layer w10: v1(3568.76,5196.14) 3704.1,5196.14 3710.85,5189.39 3766.89,5189.39 3797.5,5220 R75.1@3800,5220 ; v1(4000.8,3522.8) 4000.8,3478.7 4106.4,3373.1 4106.4,3233.9 4156.7,3183.6 4906.38,3183.6 4933.04,3156.94 5249.74,3156.94 5309.83,3217.03 5638.91,3217.03 5711.88,3290 6012.33,3290 6049.54,3252.79 6485.81,3252.79 6536.09,3202.51 6805.82,3202.51 6900.42,3107.91 7371.95,3107.91 7411.51,3068.36 7777.79,3068.36 7861.61,2984.54 TP1810.1@7939.19,2984.54 ; TP1810.1@7940,2990 7940,2985.35 TP1810.1@7939.19,2984.54 ; Q5.3@8060,2861.5 8060,2890.78 8030,2920.78 R74.2@8030,2940 8025.21,2944.79 7978.94,2944.79 TP1810.1@7939.19,2984.54
XSIG360181: Q212.3 R72.1 R73.2 TP1809.1 | length 444.2
  Bottom Layer w10: TP1809.1@7945,2860 7936.66,2860 7904.29,2827.63 7904.29,2794.54 7965.66,2733.17 8015.95,2733.17 8020,2729.12 R73.2@8020,2690 R72.1@8020,2620 8020,2592.48 8060,2552.48 Q212.3@8060,2531.5
XSIG360183: D160.3 R70.2 TP1808.1 | length 211
  Bottom Layer w10: D160.3@8250,2281.5 8250,2353.88 ; R70.2@8250,2400 8250,2353.88 ; TP1808.1@8340,2360 8256.12,2360 8250,2353.88
XSIG360188: D161.3 R75.2 TP1807.1 | length 267.3
  Bottom Layer w10: R75.2@3800,5300 3893.5,5300 3895,5301.5 D161.3@3930,5301.5 3931.4,5302.9 3931.4,5366.49 3907.84,5390.05 3875,5390.05 TP1807.1@3875,5395
pads on no net: D5.2 D6.2 D7.1 D53.2 D54.2 D55.2 D56.2 D57.2 D58.2 D73.3 D76.2 D77.2 D78.2 D271.2 D274.2 D275.2 D276.2 D277.2 D278.2 D279.2 D281.2 D282.2 D287.2 D289.2 D290.2 D294.2 D295.2 D296.2 D297.2 D312.3 D313.3 D370.2 D371.2 D372.2 D373.2 D374.2 D375.2 D376.2 D377.2 D378.2 D379.2 D380.2 D381.2 D382.2 D383.2 D384.2 D385.2 D391.2 D392.2 D393.2 D394.2 D395.2 D396.2 D398.2 J1. J2. J3. J7. J8.6 J9.6 J9.7 J9.8 J10.6 J11.6 J11.7 J11.8 TP148.1 TP1300.1 TP1511.1 TP1739.1 U1.35 U1.86 U1.97 U1.98 U3.A9 U3.A10 U3.A12 U3.A15 U3.B9 U3.B10 U3.B11 U3.B12 U3.B16 U3.C14 U3.C15 U3.D4 U3.D5 U3.D6 U3.D7 U3.D8 U3.D9 U3.D10 U3.D11 U3.D12 U3.D13 U3.D14 U3.D15 U3.D16 U3.E4 U3.E5 U3.E6 U3.E7 U3.E8 U3.E9 U3.E10 U3.E11 U3.E12 U3.E13 U3.E14 U3.F4 U3.F5 U3.F6 U3.F7 U3.F10 U3.F11 U3.F12 U3.F13 U3.F14 U3.G4 U3.G5 U3.G6 U3.G11 U3.G12 U3.G13 U3.G16 U3.H4 U3.H12 U3.H13 U3.H15 U3.J4 U3.J5 U3.J12 U3.J13 U3.J15 U3.K4 U3.K5 U3.K6 U3.K11 U3.K12 U3.K13 U3.L4 U3.L5 U3.L7 U3.L10 U3.L11 U3.L12 U3.L13 U3.M3 U3.M4 U3.M6 U3.M7 U3.M10 U3.M11 U3.M12 U3.M13 U3.N3 U3.N5 U3.N6 U3.N7 U3.N8 U3.N9 U3.N10 U3.N11 U3.N12 U3.N13 U3.P14 U4.35 U4.86 U4.97 U4.98 U6.A10 U6.A12 U6.B8 U6.B11 U6.B12 U6.B13 U6.B14 U6.C14 U6.D4 U6.D5 U6.D6 U6.D7 U6.D8 U6.D9 U6.D10 U6.D11 U6.D12 U6.D13 U6.D15 U6.E4 U6.E5 U6.E6 U6.E7 U6.E8 U6.E9 U6.E10 U6.E11 U6.E12 U6.E13 U6.E15 U6.F3 U6.F4 U6.F5 U6.F6 U6.F7 U6.F10 U6.F11 U6.F12 U6.G4 U6.G5 U6.G6 U6.G11 U6.G12 U6.G13 U6.G14 U6.H3 U6.H4 U6.H12 U6.H13 U6.J3 U6.J4 U6.J5 U6.J12 U6.J13 U6.J15 U6.K2 U6.K3 U6.K4 U6.K5 U6.K6 U6.K11 U6.K12 U6.K13 U6.L2 U6.L3 U6.L4 U6.L5 U6.L7 U6.L10 U6.L11 U6.L12 U6.M4 U6.M6 U6.M7 U6.M10 U6.M11 U6.M12 U6.N3 U6.N5 U6.N6 U6.N7 U6.N8 U6.N9 U6.N10 U6.N11 U6.P7 U6.P15 U6.R16 U6.T6 U6.T15 U8.1 U8.5 U8.7 U8.8 U12.12 U12.13 U15.12 U15.13 U16.2 U16.6 U19.8 U22.4 U22.12 U139.1 U139.13 U214.1 U214.12 U214.13 U236.1 U236.13 U237.1 U237.13 U238.1 U238.13 U243.1 U243.13 U244.1 U244.13 U261. U262.11 U262.12 U262.13 U262.14 Y1.1

## Polygon pours and split planes (outlines as drawn)
GND on Top Layer "Top Layer-GND" (solid, remove dead copper, pour order 6): 5640,1120 5730,1120 5740,1110 5740,880 5720,860 5640,860 5620,880 5620,1100
GND on Top Layer "Top Layer-GND 1" (solid, remove dead copper, pour order 27): 4970,1510 5225,1510 5240,1525 5240,1740 5210,1770 4990,1770 4980,1760 4980,1680 4940,1640 4940,1540
GND on Top Layer "Top Layer-GND 2" (solid, remove dead copper, pour order 12): 7320,2840 7360,2880 7360,2940 7370,2950 7470,2950 7480,2940 7480,2780 7460,2760 7200,2760 7180,2780 7180,2820 7200,2840
GND on Top Layer "Top Layer-GND 3" (solid, remove dead copper, pour order 24): 4270,7775 4295,7750 4295,7535 4275,7515 4155,7515 4075,7595 4075,7695 4155,7775
GND on Top Layer "Top Layer-GND 4" (solid, remove dead copper, pour order 53): 9760,360 9800,320 9800,162.5 9737.5,100 9060,100 9020,140 9020,340 9040,360
GND on Top Layer "Top Layer-GND 5" (solid, remove dead copper, pour order 0): 10260,1040 10440,1040 10460,1020 10460,980 10440,960 10260,960
GND on Top Layer "Top Layer-GND 6" (solid, remove dead copper, pour order 9): 10160,820 10180,840 10180,1000 10160,1020 10020,1020 10000,1000 10000,840 10020,820
GND on Top Layer "Top Layer-GND 7" (solid, remove dead copper, pour order 30): 10220,1640 10420,1640 10440,1620 10440,1480 10360,1400 10360,1280 10340,1260 10240,1260 10200,1300 10200,1620
GND on Top Layer "Top Layer-GND 8" (solid, remove dead copper, pour order 8): 6740,2300 6820,2300 6840,2320 6840,2560 6820,2580 6740,2580 6720,2560 6720,2320
GND on Top Layer "Top Layer-GND 9" (solid, remove dead copper, pour order 17): 8580,3340 8620,3380 8620,3620 8480,3620 8460,3600 8460,3360 8480,3340
GND on Top Layer "Top Layer-GND 10" (solid, remove dead copper, pour order 34): 9940,1840 9900,1800 9900,1480 9940,1440 10080,1440 10120,1480 10120,1820 10100,1840
GND on Top Layer "Top Layer-GND 11" (solid, remove dead copper, pour order 56): 9668.28,2160 9820,2160 9840,2180 9840,2300 9860,2320 10460,2320 10480,2300 10480,1920 10460,1900 9860,1900 9840,1920 9840,2060 9820,2080 9660,2080 9640,2100 9640,2140 9654.14,2154.14
GND on Top Layer "Top Layer-GND 12" (solid, remove dead copper, pour order 10): 6080,4440 6180,4440 6200,4420 6200,4200 6180,4180 6080,4180 6060,4200 6060,4420
GND on Top Layer "Top Layer-GND 13" (solid, remove dead copper, pour order 16): 4780,4300 4880,4300 4900,4280 4900,4060 4880,4040 4780,4040 4720,4100 4720,4240
GND on Top Layer "Top Layer-GND 14" (solid, remove dead copper, pour order 21): 3200,3060 3340,3060 3340,3320 3320,3340 3200,3340 3160,3300 3160,3080 3180,3060 3220,3060
GND on Top Layer "Top Layer-GND 15" (solid, remove dead copper, pour order 35): 4720,7760 4860,7760 4900,7720 4900,7360 4860,7320 4740,7320 4700,7360 4700,7740
GND on Top Layer "Top Layer-GND 16" (solid, remove dead copper, pour order 28): 440,6880 480,6840 480,6720 460,6700 80,6700 60,6720 60,6860 80,6880
GND on Top Layer "Top Layer-GND 17" (solid, remove dead copper, pour order 15): 9500,6580 9500,6320 9480,6300 9380,6300 9360,6320 9360,6580 9380,6600 9480,6600
GND on Top Layer "Top Layer-GND 18" (solid, remove dead copper, pour order 11): 9780,6440 10000,6440 10020,6420 10020,6320 10000,6300 9780,6300 9760,6320 9760,6420
GND on Top Layer "Top Layer-GND 19" (solid, remove dead copper, pour order 23): 10280,6600 10440,6600 10460,6580 10460,6340 10440,6320 10300,6320 10280,6340
GND on Top Layer "Top Layer-GND 20" (solid, remove dead copper, pour order 51): 5220,760 5240,780 5240,1020 5200,1060 5200,1160 5180,1180 4860,1180 4840,1160 4840,1080 4780,1020 4780,780 4800,760
+3.3V on Top Layer "Top Layer-+3.3V" (solid, remove dead copper, pour order 52): 9480,920 9500,900 9500,440 9460,400 9140,400 9100,440 9100,780 9140,820 9300,820 9340,860 9340,900 9360,920
+3.3V on Top Layer "Top Layer-+3.3V 1" (solid, remove dead copper, pour order 13): 6740,2280 6840,2280 6860,2260 6860,2020 6840,2000 6740,2000 6720,2020 6720,2260
+3.3V on Top Layer "Top Layer-+3.3V 2" (solid, remove dead copper, pour order 5): 5460,1380 5580,1380 5600,1360 5600,1200 5560,1160 5460,1160
VCC15+ on Top Layer "Top Layer-VCC15+" (solid, remove dead copper, pour order 40): 5080,7320 5140,7320 5220,7400 5220,7820 5120,7920 5100,7920 5040,7860 5040,7360
VCC15+ on Top Layer "Top Layer-VCC15+ 1" (solid, remove dead copper, pour order 7): 10220,2360 10340,2360 10360,2380 10360,2560 10340,2580 10280,2580 10200,2500 10200,2380
VCC15+ on Top Layer "Top Layer-VCC15+ 2" (solid, remove dead copper, pour order 4): 5840,4680 5900,4680 5920,4660 5920,4480 5880,4440 5840,4440 5820,4460 5820,4660
VCC15+ on Top Layer "Top Layer-VCC15+ 3" (solid, remove dead copper, pour order 3): 6140,4660 6140,4480 6160,4460 6200,4460 6220,4480 6220,4700 6180,4700
VCC15+ on Top Layer "Top Layer-VCC15+ 4" (solid, remove dead copper, pour order 46): 440,6960 460,6980 460,7260 420,7300 100,7300 80,7280 80,6980 100,6960
VCC15+ on Top Layer "Top Layer-VCC15+ 5" (solid, remove dead copper, pour order 47): 9600,6280 9700,6280 9720,6300 9720,6440 9740,6460 10020,6460 10060,6420 10060,6360 10100,6320 10180,6320 10200,6340 10200,6580 10180,6600 9600,6600 9580,6580 9580,6300
VCC15- on Top Layer "Top Layer-VCC15-" (solid, remove dead copper, pour order 19): 4340,7820 4460,7820 4500,7780 4500,7540 4460,7500 4380,7500 4340,7540
VCC15- on Top Layer "Top Layer-VCC15- 1" (solid, remove dead copper, pour order 20): 4760,8060 4740,8040 4680,8040 4500,7860 4500,7780 4340,7780 4340,7860 4360,7880 4420,7880 4620,8080 4620,8140 4640,8160 4740,8160 4760,8140
VCC15- on Top Layer "Top Layer-VCC15- 2" (solid, remove dead copper, pour order 22): 8220,3860 8600,3860 8620,3840 8620,3760 8600,3740 8220,3740 8200,3760 8200,3840
VCC15- on Top Layer "Top Layer-VCC15- 3" (solid, remove dead copper, pour order 1): 4780,4520 4800,4540 4840,4540 4860,4520 4860,4340 4840,4320 4800,4320 4780,4340
VCC15- on Top Layer "Top Layer-VCC15- 4" (solid, remove dead copper, pour order 2): 5120,4540 5160,4540 5180,4520 5180,4340 5160,4320 5120,4320 5100,4340 5100,4520
+5V on Top Layer "Top Layer-+5V" (solid, remove dead copper, pour order 50): 9700,1440 9760,1500 9760,2020 9740,2040 9520,2040 9480,2000 9480,1480 9520,1440
-5V on Top Layer "Top Layer--5V" (solid, remove dead copper, pour order 41): 8360,3360 8380,3380 8380,3620 8400,3640 8620,3640 8620,3700 8600,3720 8160,3720 8140,3700 8140,3450 8230,3360
+1.8V on Top Layer "Top Layer-+1.8V" (solid, remove dead copper, pour order 55): 4980,1920 5240,1920 5300,1860 5300,1740 5340,1700 5600,1700 5640,1660 5760,1660 5800,1620 5800,1520 5760,1480 5760,1180 5740,1160 5660,1160 5600,1100 5600,880 5580,860 5540,860 5500,820 5460,820 5440,840 5440,1100 5460,1120 5560,1120 5620,1180 5620,1380 5580,1420 5300,1420 5300,1440 5280,1460 5280,1700 5260,1720 5260,1760 5230,1790 4970,1790 4960,1800 4960,1900
VREF+ on Top Layer "Top Layer-VREF+" (solid, remove dead copper, pour order 31): 5960,4140 5980,4160 5980,4440 6020,4480 6100,4480 6100,4660 5960,4660 5940,4640 5940,4460 5900,4420 5840,4420 5820,4400 5820,4160 5840,4140
VREF- on Top Layer "Top Layer-VREF-" (solid, remove dead copper, pour order 29): 5000,4040 5100,4040 5120,4060 5120,4280 5060,4340 5060,4520 5040,4540 4920,4540 4900,4520 4900,4320 4920,4300 4960,4300 4980,4280 4980,4060
VREF3V on Top Layer "Top Layer-VREF3V" (solid, remove dead copper, pour order 18): 7300,2860 7340,2900 7340,2955 7350,2965 7480,2965 7500,2985 7500,3100 7480,3120 7360,3120 7340,3100 7340,3020 7320,3000 7200,3000 7180,2980 7180,2880 7200,2860
XSIG020896 on Top Layer "Top Layer-XSIG020896" (solid, remove dead copper, pour order 14): 3080,3340 3100,3320 3100,3100 3080,3080 2960,3080 2940,3100 2940,3320 2960,3340
XSIG030853 on Top Layer "Top Layer-XSIG030853" (solid, remove dead copper, pour order 33): 5780,860 5880,860 5900,880 5900,1160 5920,1180 5920,1380 5980,1440 5980,1460 5920,1460 5860,1400 5800,1400 5780,1380 5780,1160 5760,1140 5760,880
XSIG030857 on Top Layer "Top Layer-XSIG030857" (solid, remove dead copper, pour order 38): 6540,2000 6680,2000 6700,2020 6700,2580 6680,2600 6560,2600 6540,2580
XSIG050961 on Top Layer "Top Layer-XSIG050961" (solid, remove dead copper, pour order 36): 4940,1500 4950,1490 5250,1490 5260,1480 5260,1420 5280,1400 5400,1400 5420,1380 5420,1160 5400,1140 5300,1140 5280,1160 5280,1320 5240,1360 4960,1360 4840,1480 4800,1480 4780,1500
XSIG050964 on Top Layer "Top Layer-XSIG050964" (solid, remove dead copper, pour order 42): 5400,880 5400,1100 5380,1120 5300,1120 5260,1160 5260,1300 5220,1340 4940,1340 4840,1440 4740,1440 4740,1420 4960,1200 5200,1200 5220,1180 5220,1080 5260,1040 5260,900 5280,880
XSIG081877 on Top Layer "Top Layer-XSIG081877" (solid, remove dead copper, pour order 54): 9440,1380 9680,1380 9700,1360 9700,1040 9800,940 9800,440 9760,400 9560,400 9540,420 9540,940 9420,1060 9420,1360
XSIG081898 on Top Layer "Top Layer-XSIG081898" (solid, remove dead copper, pour order 44): 10400,1380 10400,1280 10420,1260 10520,1260 10560,1300 10560,2540 10540,2560 10440,2560 10420,2540 10420,2380 10440,2360 10480,2360 10500,2340 10500,1480
XSIG081921 on Top Layer "Top Layer-XSIG081921" (solid, remove dead copper, pour order 48): 10200,1040 10200,1200 10000,1400 9780,1400 9760,1380 9760,1060 9780,1040
XSIG082226 on Top Layer "Top Layer-XSIG082226" (solid, remove dead copper, pour order 26): 10420,1880 10460,1840 10460,1700 10440,1680 10180,1680 10160,1700 10160,1860 10180,1880
PGND on Top Layer "Top Layer-PGND" (solid, remove dead copper, pour order 39): 10450,430 10560,430 10580,410 10580,140 10480,40 10320,40 10280,80 10280,260
PGND on Top Layer "Top Layer-PGND 1" (solid, remove dead copper, pour order 43): 100,340 450,340 450,90 420,60 120,60 60,120 60,300
GND on Mid Layer 1 "Mid Layer 1-GND" (solid, remove dead copper, pour order 70): 9940,120 10560,740 10560,7800 10520,7840 10040,7840 9920,7960 9920,8080 9840,8160 920,8160 560,7800 240,7800 120,7680 120,760 760,120
+3.3V on Mid Layer 2 "Mid Layer 2-+3.3V" (solid, remove dead copper, pour order 68): 500,3240 510,3230 510,2910 500,2900 350,2900 340,2890 340,2570 350,2560 1170,2560 1180,2570 1180,3230 1190,3240 2480,3240 2520,3200 2520,2940 2560,2900 3020,2900 3400.26,2519.74 8399.99,2519.99 9160,3280 10520,3280 10550,3250 10550,770 10460,680 10360,680 10050,370 10050,70 10029.57,49.57 6880,40 6830,90 6830,1200 6800,1230 6610,1230 6580,1260 6580,1380 6590,1390 6680,1390 6710,1420 6710,1610 6690,1630 6540,1630 6520,1650 6520,1760 6500,1780 6060,1780 5950,1670 5790,1670 5700,1760 5380,1760 5200,1940 4270,1940 4230,1900 4230,1680 4220,1670 4060,1670 4040,1650 4040,1510 4060,1490 4150,1490 4170,1470 4170,1430 4150,1410 4090,1410 4080,1400 4080,1280 4100,1260 4280,1260 4300,1240 4300,1180 4330,1150 4520,1150 4530,1160 4530,1310 4550,1330 5260,1330 5300,1290 5300,810 5350,760 5470,760 5660,950 5660,1140 5640,1160 5590,1160 5570,1180 5570,1340 5580,1350 6180,1350 6240,1290 6240,1210 6270,1180 6360,1180 6370,1190 6370,1280 6380,1290 6420,1290 6430,1280 6430,1200 6460,1170 6550,1170 6600,1220 6800,1220 6820,1200 6820,80 6790,50 790,50 730,110 730,180 440,470 100,470 60,510 54.62,3240
VCC15+ on Mid Layer 2 "Mid Layer 2-VCC15+" (solid, remove dead copper, pour order 57): 8080,2980 8700,3600 9200,3600 9200,3380 8380,2560 7880,2560 7880,2980
VCC15+ on Mid Layer 2 "Mid Layer 2-VCC15+ 1" (solid, remove dead copper, pour order 62): 2800,3300 2980,3300 2980,3180 3000,3160 3400,3160 3440,3120 3440,3020 3480,2980 7900,2980 7900,2560 3420,2560 3040,2940 2660,2940 2600,3000 2600,3280 2560,3320 2560,3360 2800,3360
VCC15+ on Mid Layer 2 "Mid Layer 2-VCC15+ 2" (solid, remove dead copper, pour order 65): 5580,4640 5680,4740 6600,4740 6640,4700 6640,4500 6680,4460 6900,4460 7000,4560 7360,4560 7440,4480 7780,4480 7840,4540 7840,4640 7880,4680 8020,4680 8180,4840 8580,4840 8640,4900 8640,5580 8660,5600 9060,5600 9200,5740 9200,8220 9900,8220 9960,8160 9960,7920 10020,7860 10520,7860 10560,7820 10580.37,3400.37 10520,3340 8740,3340 8680,3400 8680,4040 8660,4060 7740,4060 7660,4140 7660,4260 7600,4320 7200,4320 6920,4040 5660,4040 5580,4120